# Altium PCB Grabber_DIOT.PCBDOC (part 3 of 7)
Units mm, origin at the board's own origin, x right, y up, seen from the top; angles counter-clockwise.
Board outline 222.9 x 100 mm, 4 copper layers (L1, P2, P3, L4), stack 1.6 mm thick; 235 components, 180 nets, 1032 pads, 664 vias.
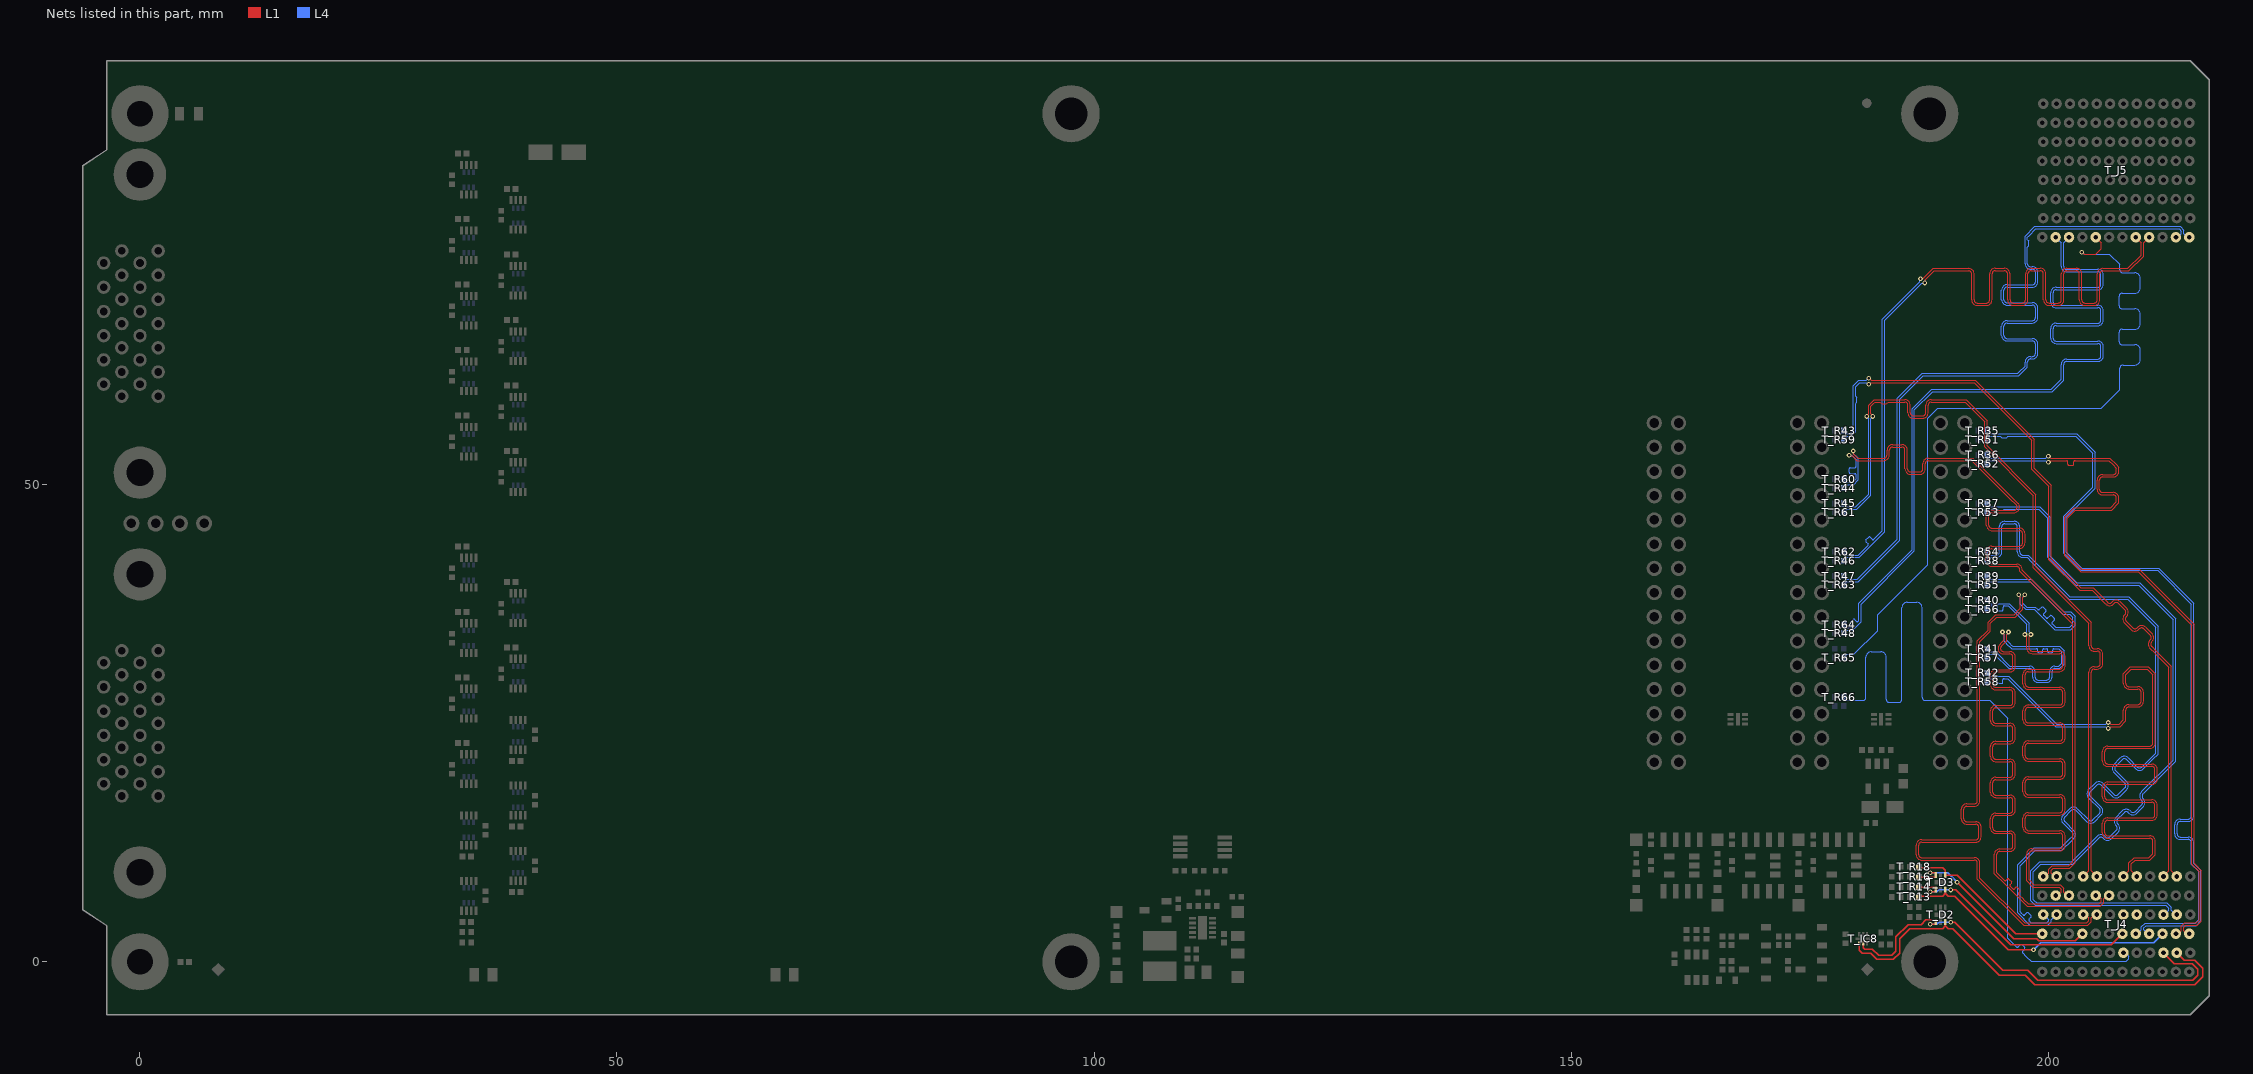
[diagram p4: the nets of this part, all layers, seen from the top]

## Via types
v1: diameter 0.5, hole 0.25, L1 to L4, tented both sides, 661 vias
v2: diameter 0.5, hole 0.25, L1 to L4, 3 vias

## Nets (pads, with @x,y where several pads share a name; then routed paths per layer and width w, separated by ;. In a path a pad name is that pad's centre, name@x,y a point inside that pad or via, vN(x,y) a via of type N, cw(c..) or ccw(c..) an arc to the next point about the centre after c; other vN are vias at no path point) (continued)
BP_IO.LVDS_N14: (continued)
  L4 w0.127: T_R65.1@178.608,31.881 178.835,32.107 178.835,32.149 178.909,32.223 179.654,32.223 182.151,34.719 182.151,36.393 187.375,41.617 187.375,56.963 188.418,58.006 205.601,58.006 207.534,59.94 207.534,60.946 207.534,62.228 cw(c207.859,62.228) 207.859,62.553 209.095,62.553 ccw(c209.095,63.132) 209.675,63.132 209.675,64.109 ccw(c209.095,64.109) 209.095,64.688 207.774,64.688 cw(c207.774,65.013) 207.448,65.013 207.448,65.99 cw(c207.774,65.99) 207.774,66.315 209.095,66.315 ccw(c209.095,66.894) 209.675,66.894 209.675,67.871 ccw(c209.095,67.871) 209.095,68.45 207.774,68.45 cw(c207.774,68.775) 207.448,68.775 207.448,69.752 cw(c207.774,69.752) 207.774,70.077 209.095,70.077 ccw(c209.095,70.656) 209.675,70.656 209.675,71.633 ccw(c209.095,71.633) 209.095,72.212 207.859,72.212 cw(c207.859,72.537) 207.534,72.537 207.534,72.728 207.534,73.095 206.438,74.191 203.792,74.191 203.606,74.377 v1(203.531,74.377)
BP_IO.LVDS_N15: T_J4.F2 T_R66.2 | length 86.5
  L4 w0.127: T_R66.2@178.608,27.74 178.835,27.513 178.835,27.471 178.909,27.397 180.394,27.397 180.585,27.397 ccw(c180.585,27.722) 180.91,27.722 180.91,31.916 cw(c181.489,31.916) 181.489,32.496 182.466,32.496 cw(c182.466,31.916) 183.045,31.916 183.045,27.515 ccw(c183.37,27.515) 183.37,27.19 184.347,27.19 ccw(c184.347,27.515) 184.672,27.515 184.672,37.095 cw(c185.251,37.095) 185.251,37.674 186.228,37.674 cw(c186.228,37.095) 186.807,37.095 186.807,27.722 ccw(c187.132,27.722) 187.132,27.397 187.885,27.397 193.915,27.397 195.766,25.546 195.766,2.49 196.657,1.598 196.702,1.553 ccw(c196.792,1.643) 196.882,1.553 197.097,1.769 cw(c197.186,1.68) 197.275,1.769 197.541,1.503 cw(c197.452,1.414) 197.541,1.325 197.325,1.11 ccw(c197.415,1.02) 197.325,0.93 197.685,0.57 197.73,0.525 198.222,0.033 208.179,0.033 208.473,0.327 208.473,0.371 208.473,0.581 208.104,0.95 T_J4.F2@207.9,0.95
BP_IO.LVDS_P0: T_J4.D3 T_R35.1 | length 83.2
  L4 w0.127: T_R35.1@193.608,55.68 193.835,55.453 193.835,55.411 193.909,55.337 203.033,55.337 204.952,53.417 204.952,49.629 201.921,46.598 201.921,42.906 203.553,41.275 211.593,41.275 215.276,37.591 215.276,16.964 215.276,15.288 cw(c214.697,15.288) 214.697,14.709 213.858,14.709 ccw(c213.858,14.383) 213.532,14.383 213.532,13.407 ccw(c213.858,13.407) 213.858,13.082 214.697,13.082 cw(c214.697,12.502) 215.276,12.502 215.276,12.312 215.276,10.354 216.034,9.596 216.034,4.302 215.525,3.793 210.272,3.793 210.027,3.547 210.027,3.337 210.414,2.95 T_J4.D3@210.6,2.95
BP_IO.LVDS_P1: T_J4.A3 T_R36.1 | length 82.4
  L1 w0.127: v1(200.044,52.983) 200.119,52.983 200.304,52.797 206.469,52.797 207.127,52.139 207.423,51.843 207.423,51.402 cw(c206.843,51.402) 206.843,50.822 205.714,50.822 ccw(c205.714,50.497) 205.388,50.497 205.388,49.521 ccw(c205.714,49.521) 205.714,49.195 206.843,49.195 cw(c206.843,48.616) 207.423,48.616 207.423,48.425 207.423,48.109 206.66,47.347 202.868,47.347 201.999,46.477 201.999,42.661 203.51,41.15 209.554,41.15 215.314,35.39 215.314,10.337 216.086,9.564 216.086,4.251 215.663,3.828 214.441,3.828 214.227,3.613 214.227,3.282 214.559,2.95 T_J4.A3@214.8,2.95
  L4 w0.127: T_R36.1@193.608,53.14 193.835,52.913 193.835,52.871 193.909,52.797 199.783,52.797 199.968,52.983 v1(200.044,52.983)
BP_IO.LVDS_P2: T_J4.B4 T_R37.1 | length 83.1
  L4 w0.127: T_R37.1@193.608,48.06 193.835,47.833 193.835,47.791 193.909,47.717 199.116,47.717 200.216,46.617 200.216,42.498 203.002,39.712 209.637,39.712 213.405,35.944 213.405,21.049 210.082,17.726 209.947,17.591 ccw(c210.177,17.361) 209.947,17.131 209.996,17.082 cw(c209.586,16.673) 209.996,16.263 209.306,15.573 cw(c208.896,15.982) 208.486,15.573 208.425,15.634 ccw(c208.195,15.404) 207.965,15.634 207.275,14.944 ccw(c207.505,14.713) 207.275,14.483 207.336,14.422 cw(c206.926,14.013) 207.336,13.603 206.646,12.913 cw(c206.236,13.322) 205.826,12.913 205.777,12.961 ccw(c205.547,12.731) 205.317,12.961 204.685,12.329 202.592,10.236 199.231,10.236 198.439,9.444 198.439,6.514 198.673,6.28 198.708,6.28 198.817,6.172 212.461,6.172 212.927,5.706 212.927,5.425 213.402,4.95 T_J4.B4@213.5,4.95
BP_IO.LVDS_P3: T_J4.K4 T_R38.1 | length 82.3
  L4 w0.127: T_R38.1@193.608,42.041 193.835,42.267 193.835,42.309 193.909,42.383 194.384,42.383 194.575,42.383 ccw(c194.575,42.962) 195.154,42.962 195.154,45.596 cw(c195.48,45.596) 195.48,45.921 196.456,45.921 cw(c196.456,45.596) 196.781,45.596 196.781,42.962 ccw(c197.361,42.962) 197.361,42.383 197.797,42.383 198.254,41.926 202.159,38.021 208.357,38.021 211.286,35.092 211.286,21.878 210.864,21.456 209.822,20.413 cw(c209.592,20.644) 209.362,20.413 208.409,21.366 ccw(c208,20.956) 207.59,21.366 206.9,20.676 ccw(c207.309,20.266) 206.9,19.856 208.063,18.694 cw(c207.832,18.464) 208.063,18.233 207.372,17.543 cw(c207.142,17.773) 206.912,17.543 205.749,18.706 ccw(c205.34,18.296) 204.93,18.706 204.24,18.016 ccw(c204.649,17.606) 204.24,17.196 205.402,16.034 cw(c205.172,15.803) 205.402,15.573 204.712,14.883 cw(c204.482,15.113) 204.252,14.883 203.089,16.046 ccw(c202.679,15.636) 202.27,16.046 201.58,15.356 ccw(c201.989,14.946) 201.58,14.536 202.532,13.584 cw(c202.302,13.353) 202.532,13.123 202.397,12.989 201.352,11.943 198.569,11.943 196.815,10.188 196.815,5.144 198.105,3.853 199.967,3.853 200.327,4.214 200.327,4.424 200.853,4.95 T_J4.K4@200.9,4.95
BP_IO.LVDS_P4: T_J4.H4 T_R39.1 | length 83.1
  L1 w0.127: v1(196.927,38.465) 196.927,38.39 197.112,38.204 197.112,37.049 196.456,36.393 194.497,36.393 193.712,35.607 193.712,34.777 192.603,33.668 192.603,17.906 192.603,16.888 cw(c192.278,16.888) 192.278,16.562 191.497,16.562 ccw(c191.497,15.983) 190.918,15.983 190.918,15.007 ccw(c191.497,15.007) 191.497,14.427 192.421,14.427 cw(c192.421,14.102) 192.747,14.102 192.747,13.126 cw(c192.421,13.126) 192.421,12.8 186.762,12.8 ccw(c186.762,12.221) 186.182,12.221 186.182,11.245 ccw(c186.762,11.245) 186.762,10.665 192.278,10.665 cw(c192.278,10.34) 192.603,10.34 192.603,10.149 192.603,8.671 197.456,3.818 204.164,3.818 204.527,4.181 204.527,4.618 204.859,4.95 T_J4.H4@205.1,4.95
  L4 w0.127: T_R39.1@193.608,40.44 193.835,40.213 193.835,40.171 193.909,40.097 198.261,40.097 201.648,36.71 202.361,36.71 202.85,36.22 202.85,35.277 202.381,34.808 200.688,34.808 198.562,36.934 197.645,36.934 197.112,37.467 197.112,38.204 196.927,38.39 v1(196.927,38.465)
BP_IO.LVDS_P5: T_J4.J5 T_R40.1 | length 82.4
  L1 w0.127: v1(198.204,34.311) 198.204,34.236 198.019,34.05 198.019,33.081 198.019,32.891 ccw(c198.344,32.891) 198.344,32.565 201.227,32.565 cw(c201.227,31.986) 201.806,31.986 201.806,31.01 cw(c201.227,31.01) 201.227,30.43 197.946,30.43 ccw(c197.946,30.105) 197.62,30.105 197.62,29.129 ccw(c197.946,29.129) 197.946,28.803 201.227,28.803 cw(c201.227,28.224) 201.806,28.224 201.806,27.248 cw(c201.227,27.248) 201.227,26.668 197.946,26.668 ccw(c197.946,26.343) 197.62,26.343 197.62,25.367 ccw(c197.946,25.367) 197.946,25.041 201.227,25.041 cw(c201.227,24.462) 201.806,24.462 201.806,23.486 cw(c201.227,23.486) 201.227,22.906 197.946,22.906 ccw(c197.946,22.581) 197.62,22.581 197.62,21.605 ccw(c197.946,21.605) 197.946,21.279 201.227,21.279 cw(c201.227,20.7) 201.806,20.7 201.806,19.724 cw(c201.227,19.724) 201.227,19.144 197.946,19.144 ccw(c197.946,18.819) 197.62,18.819 197.62,17.843 ccw(c197.946,17.843) 197.946,17.517 201.227,17.517 cw(c201.227,16.938) 201.806,16.938 201.806,15.962 cw(c201.227,15.962) 201.227,15.382 197.946,15.382 ccw(c197.946,15.057) 197.62,15.057 197.62,14.081 ccw(c197.946,14.081) 197.946,13.755 201.227,13.755 cw(c201.227,13.176) 201.806,13.176 201.806,12.2 cw(c201.227,12.2) 201.227,11.62 198.344,11.62 ccw(c198.344,11.295) 198.019,11.295 198.019,10.049 198.019,8.59 198.527,8.082 201.264,8.082 201.627,7.719 201.627,7.282 201.959,6.95 T_J4.J5@202.2,6.95
  L4 w0.127: T_R40.1@193.608,37.9 193.835,37.673 193.835,37.631 193.909,37.557 195.946,37.557 198.019,35.485 198.019,34.572 198.204,34.387 v1(198.204,34.311)
BP_IO.LVDS_P6: T_J4.G5 T_R41.1 | length 83.2
  L1 w0.127: v1(195.226,34.566) 195.226,34.49 195.412,34.305 195.412,33.737 195.165,33.489 194.931,33.256 ccw(c195.341,32.846) 195.341,32.267 195.999,32.267 cw(c195.999,31.942) 196.325,31.942 196.325,30.965 cw(c195.999,30.965) 195.999,30.64 194.537,30.64 ccw(c194.537,30.061) 193.958,30.061 193.958,29.084 ccw(c194.537,29.084) 194.537,28.505 195.999,28.505 cw(c195.999,28.18) 196.325,28.18 196.325,27.203 cw(c195.999,27.203) 195.999,26.878 194.537,26.878 ccw(c194.537,26.299) 193.958,26.299 193.958,25.322 ccw(c194.537,25.322) 194.537,24.743 195.999,24.743 cw(c195.999,24.418) 196.325,24.418 196.325,23.441 cw(c195.999,23.441) 195.999,23.116 194.537,23.116 ccw(c194.537,22.537) 193.958,22.537 193.958,21.56 ccw(c194.537,21.56) 194.537,20.981 195.999,20.981 cw(c195.999,20.656) 196.325,20.656 196.325,19.679 cw(c195.999,19.679) 195.999,19.354 194.537,19.354 ccw(c194.537,18.775) 193.958,18.775 193.958,17.798 ccw(c194.537,17.798) 194.537,17.219 195.999,17.219 cw(c195.999,16.894) 196.325,16.894 196.325,15.917 cw(c195.999,15.917) 195.999,15.592 194.537,15.592 ccw(c194.537,15.013) 193.958,15.013 193.958,14.036 ccw(c194.537,14.036) 194.537,13.457 195.999,13.457 cw(c195.999,13.132) 196.325,13.132 196.325,12.155 cw(c195.999,12.155) 195.999,11.83 194.955,11.83 ccw(c194.955,11.251) 194.375,11.251 194.375,10.139 194.375,9.239 195.439,8.176 197.796,5.818 205.464,5.818 205.827,6.181 205.827,6.618 206.159,6.95 T_J4.G5@206.4,6.95
  L4 w0.127: T_R41.1@193.608,32.82 193.835,32.593 193.835,32.551 193.909,32.477 194.495,32.477 195.969,31.002 196.919,31.002 198.076,31.002 cw(c198.076,30.443) 198.636,30.443 198.636,29.845 ccw(c198.941,29.845) 198.941,29.539 199.857,29.539 ccw(c199.857,29.845) 200.163,29.845 200.163,30.443 cw(c200.722,30.443) 200.722,31.002 200.912,31.002 201.149,31.002 201.453,31.306 201.453,32.495 201.14,32.808 200.686,32.808 200.623,32.808 ccw(c200.623,32.681) 200.496,32.681 200.496,32.524 cw(c200.39,32.524) 200.39,32.419 200.074,32.419 cw(c200.074,32.524) 199.969,32.524 199.969,32.703 ccw(c199.863,32.703) 199.863,32.808 199.547,32.808 ccw(c199.547,32.703) 199.442,32.703 199.442,32.524 cw(c199.336,32.524) 199.336,32.419 199.02,32.419 cw(c199.02,32.524) 198.915,32.524 198.915,32.681 ccw(c198.788,32.681) 198.788,32.808 198.475,32.808 196.182,32.808 195.92,33.07 195.844,33.146 195.412,33.578 195.412,34.305 195.226,34.49 v1(195.226,34.566)
BP_IO.LVDS_P7: T_J4.E6 T_R42.1 | length 82.3
  L1 w0.127: v1(206.317,25.089) 206.393,25.089 206.578,24.903 207.447,24.903 207.902,25.358 207.902,25.529 207.902,26.387 cw(c208.482,26.387) 208.482,26.967 209.428,26.967 ccw(c209.428,27.292) 209.754,27.292 209.754,28.268 ccw(c209.428,28.268) 209.428,28.594 208.482,28.594 cw(c208.482,29.173) 207.902,29.173 207.902,29.364 207.902,30.198 208.633,30.928 210.519,30.928 211.245,30.202 211.245,23.854 211.245,22.941 cw(c210.665,22.941) 210.665,22.362 206.276,22.362 ccw(c206.276,22.036) 205.95,22.036 205.95,21.06 ccw(c206.276,21.06) 206.276,20.735 210.882,20.735 cw(c210.882,20.155) 211.461,20.155 211.461,19.179 cw(c210.882,19.179) 210.882,18.6 206.276,18.6 ccw(c206.276,18.274) 205.95,18.274 205.95,17.298 ccw(c206.276,17.298) 206.276,16.973 210.882,16.973 cw(c210.882,16.393) 211.461,16.393 211.461,15.417 cw(c210.882,15.417) 210.882,14.838 206.276,14.838 ccw(c206.276,14.512) 205.95,14.512 205.95,13.536 ccw(c206.276,13.536) 206.276,13.211 210.665,13.211 cw(c210.665,12.631) 211.245,12.631 211.245,12.441 211.245,11.225 210.676,10.656 209.13,10.656 208.727,10.253 208.727,9.523 T_J4.E6@209.3,8.95
  L4 w0.127: T_R42.1@193.608,30.28 193.835,30.053 193.835,30.011 193.909,29.937 195.873,29.937 200.906,24.903 206.056,24.903 206.242,25.089 v1(206.317,25.089)
BP_IO.LVDS_P8: T_J4.B6 T_R43.1 | length 83.1
  L1 w0.127: v1(181.219,61.162) 181.295,61.162 181.48,60.977 185.499,60.977 185.5,60.975 192.366,60.975 198.568,54.774 198.568,51.729 200.346,49.951 200.346,42.269 203.421,39.195 204.719,39.195 206.092,37.822 206.189,37.724 206.226,37.687 ccw(c206.456,37.917) 206.686,37.687 206.74,37.74 cw(c207.149,37.331) 207.559,37.74 208.249,37.05 cw(c207.84,36.64) 208.287,36.272 208.287,36.268 208.184,36.166 ccw(c208.415,35.936) 208.184,35.706 208.875,35.015 ccw(c209.105,35.245) 209.335,35.015 209.4,35.08 cw(c209.81,34.671) 210.219,35.08 210.91,34.39 cw(c210.5,33.98) 210.947,33.612 210.947,33.608 210.856,33.517 ccw(c211.086,33.287) 210.856,33.057 211.344,32.57 211.441,32.472 212.927,30.986 212.927,9.523 T_J4.B6@213.5,8.95
  L4 w0.127: T_R43.1@178.608,55.68 178.835,55.453 178.835,55.411 178.909,55.337 179.213,55.337 179.567,55.691 179.567,60.391 180.153,60.977 180.958,60.977 181.144,61.162 v1(181.219,61.162)
BP_IO.LVDS_P9: T_J4.K6 T_R44.1 | length 86
  L1 w0.127: v1(179.593,53.542) 179.647,53.489 179.647,53.227 180.074,52.799 182.607,52.799 182.798,52.799 ccw(c182.798,53.125) 183.123,53.125 183.123,53.635 cw(c183.703,53.635) 183.703,54.215 184.679,54.215 cw(c184.679,53.635) 185.258,53.635 185.258,51.681 ccw(c185.584,51.681) 185.584,51.355 186.56,51.355 ccw(c186.56,51.681) 186.885,51.681 186.885,52.22 cw(c187.465,52.22) 187.465,52.799 188.202,52.799 192.121,52.799 196.31,48.611 196.847,48.073 cw(c196.437,47.664) 196.437,47.084 194.121,47.084 ccw(c194.121,46.759) 193.795,46.759 193.795,45.783 ccw(c194.121,45.783) 194.121,45.457 197.009,45.457 cw(c197.009,44.878) 197.589,44.878 197.589,43.902 cw(c197.009,43.902) 197.009,43.322 194.121,43.322 ccw(c194.121,42.997) 193.795,42.997 193.795,42.021 ccw(c194.121,42.021) 194.121,41.695 196.711,41.695 cw(c196.711,41.116) 197.291,41.116 197.291,41.03 197.396,40.925 202.849,35.472 202.849,10.39 202.287,9.828 200.541,9.828 200.327,9.613 200.327,9.282 200.659,8.95 T_J4.K6@200.9,8.95
  L4 w0.127: T_R44.1@178.608,49.661 178.835,49.887 178.835,49.929 178.909,50.003 179.613,50.003 180.13,50.52 180.13,52.743 180.055,52.818 179.771,53.102 179.647,53.227 179.647,53.489 v1(179.593,53.542)
BP_IO.LVDS_P10: T_J4.H6 T_R45.1 | length 83.1
  L1 w0.127: v1(180.999,57.169) 180.999,57.244 181.184,57.43 181.184,58.349 181.762,58.926 184.172,58.926 184.981,58.926 cw(c184.981,58.347) 185.56,58.347 185.56,57.565 ccw(c185.885,57.565) 185.885,57.24 186.862,57.24 ccw(c186.862,57.565) 187.187,57.565 187.187,58.347 cw(c187.766,58.347) 187.766,58.926 187.957,58.926 191.413,58.926 193.613,56.726 193.613,54.078 198.726,48.965 198.726,41.392 204.527,35.591 204.527,33.337 204.527,33.146 ccw(c204.852,33.146) 204.852,32.821 205.16,32.821 cw(c205.16,32.242) 205.739,32.242 205.739,31.265 cw(c205.16,31.265) 205.16,30.686 204.852,30.686 ccw(c204.852,30.361) 204.527,30.361 204.527,29.436 204.527,9.523 T_J4.H6@205.1,8.95
  L4 w0.127: T_R45.1@178.608,48.06 178.835,47.833 178.835,47.791 178.909,47.717 179.865,47.717 181.184,49.036 181.184,56.908 180.999,57.094 v1(180.999,57.169)
BP_IO.LVDS_P11: T_J5.D1 T_R46.1 | length 86
  L1 w0.127: v1(187.072,71.167) 187.125,71.221 187.125,71.483 188.066,72.424 189.602,72.424 191.674,72.424 cw(c191.674,72.099) 191.999,72.099 191.999,69.381 ccw(c192.579,69.381) 192.579,68.802 193.555,68.802 ccw(c193.555,69.381) 194.134,69.381 194.134,72.109 cw(c194.46,72.109) 194.46,72.435 195.436,72.435 cw(c195.436,72.109) 195.761,72.109 195.761,69.381 ccw(c196.341,69.381) 196.341,68.802 197.317,68.802 ccw(c197.317,69.381) 197.896,69.381 197.896,72.109 cw(c198.222,72.109) 198.222,72.435 199.198,72.435 cw(c199.198,72.109) 199.523,72.109 199.523,69.381 ccw(c200.103,69.381) 200.103,68.802 201.079,68.802 ccw(c201.079,69.381) 201.658,69.381 201.658,72.109 cw(c201.984,72.109) 201.984,72.435 202.96,72.435 cw(c202.96,72.109) 203.285,72.109 203.285,69.381 ccw(c203.865,69.381) 203.865,68.802 204.841,68.802 ccw(c204.841,69.381) 205.42,69.381 205.42,72.099 cw(c205.746,72.099) 205.746,72.424 206.391,72.424 208.476,72.424 210.027,73.975 210.027,75.377 T_J5.D1@210.6,75.95
  L4 w0.127: T_R46.1@178.608,42.041 178.835,42.267 178.835,42.309 178.909,42.383 180.22,42.383 182.893,45.056 182.893,67.251 186.756,71.114 187.018,71.114 v1(187.072,71.167)
BP_IO.LVDS_P12: T_J5.A1 T_R47.1 | length 83.1
  L4 w0.127: T_R47.1@178.608,40.44 178.835,40.213 178.835,40.171 178.909,40.097 180.004,40.097 184.205,44.298 184.205,59.067 186.82,61.681 196.826,61.681 196.971,61.826 197.59,62.445 197.59,62.869 cw(c198.17,62.869) 198.17,63.448 198.365,63.448 ccw(c198.365,63.774) 198.69,63.774 198.69,64.75 ccw(c198.365,64.75) 198.365,65.075 195.702,65.075 cw(c195.702,65.655) 195.123,65.655 195.123,66.631 cw(c195.702,66.631) 195.702,67.21 198.365,67.21 ccw(c198.365,67.536) 198.69,67.536 198.69,68.512 ccw(c198.365,68.512) 198.365,68.837 195.702,68.837 cw(c195.702,69.417) 195.123,69.417 195.123,70.393 cw(c195.702,70.393) 195.702,70.972 198.365,70.972 ccw(c198.365,71.298) 198.69,71.298 198.69,72.274 ccw(c198.365,72.274) 198.365,72.599 198.17,72.599 cw(c198.17,73.179) 197.59,73.179 197.59,73.369 197.59,76.044 198.634,77.087 213.845,77.087 214.227,76.706 214.227,76.303 214.58,75.95 T_J5.A1@214.8,75.95
BP_IO.LVDS_P13: T_J5.J1 T_R48.1 | length 86.1
  L4 w0.127: T_R48.1@178.608,34.441 178.835,34.667 178.835,34.689 178.909,34.763 179.535,34.763 180.398,35.626 180.398,37.465 186.002,43.07 186.002,57.842 187.926,59.766 200.434,59.766 201.627,60.958 201.627,61.632 201.627,62.6 cw(c201.952,62.6) 201.952,62.926 205.22,62.926 ccw(c205.22,63.505) 205.8,63.505 205.8,64.481 ccw(c205.22,64.481) 205.22,65.061 200.852,65.061 cw(c200.852,65.386) 200.527,65.386 200.527,66.362 cw(c200.852,66.362) 200.852,66.688 205.22,66.688 ccw(c205.22,67.267) 205.8,67.267 205.8,68.243 ccw(c205.22,68.243) 205.22,68.823 200.852,68.823 cw(c200.852,69.148) 200.527,69.148 200.527,70.124 cw(c200.852,70.124) 200.852,70.45 205.22,70.45 ccw(c205.22,71.029) 205.8,71.029 205.8,72.005 ccw(c205.22,72.005) 205.22,72.585 201.952,72.585 cw(c201.952,72.91) 201.627,72.91 201.627,73.101 201.627,75.377 T_J5.J1@202.2,75.95

## Text inside footprints (layer, text, board x,y; h text height)
T_J4: TopOverlay "A" at 215.3,11.45 h1 r90; TopOverlay "B" at 213.9,11.45 h1 r90; TopOverlay "C" at 212.5,11.45 h1 r90; TopOverlay "D" at 211.1,10.35 h1 r90; TopOverlay "E" at 209.7,10.35 h1 r90; TopOverlay "F" at 208.3,10.35 h1 r90; TopOverlay "G" at 206.9,10.35 h1 r90; TopOverlay "H" at 205.5,10.35 h1 r90; TopOverlay "I" at 204.1,10.6 h1 r90; TopOverlay "J" at 202.7,10.35 h1 r90; TopOverlay "K" at 201.3,10.35 h1 r90; TopOverlay "L" at 199.9,10.35 h1 r90; TopOverlay "1" at 194.85,-1.4 h1 r90; TopOverlay "2" at 194.85,0.6 h1 r90; TopOverlay "3" at 194.85,2.6 h1 r90; TopOverlay "4" at 194.85,4.6 h1 r90; TopOverlay "5" at 194.85,6.6 h1 r90; TopOverlay "6" at 194.85,8.6 h1 r90; DrillDrawing "PRESS-FIT TECHNOLOGY" at 198.539,-7.64 h1; DrillDrawing "Diam. 0.5mm +/-0.05" at 198.539,-9.14 h1; Mechanical14 "A" at 215.3,-4.25 h1 r90; Mechanical14 "B" at 213.9,-4.25 h1 r90; Mechanical14 "C" at 212.5,-4.25 h1 r90; Mechanical14 "D" at 211.1,-3.25 h1 r90; Mechanical14 "E" at 209.7,-3.25 h1 r90; Mechanical14 "F" at 208.3,-3.25 h1 r90; Mechanical14 "G" at 206.9,-3.25 h1 r90; Mechanical14 "H" at 205.5,-3.25 h1 r90; Mechanical14 "I" at 204.1,-3 h1 r90; Mechanical14 "J" at 202.7,-3.25 h1 r90; Mechanical14 "K" at 201.3,-3.25 h1 r90; Mechanical14 "L" at 199.9,-3.25 h1 r90; Mechanical14 "1" at 194.85,-1.4 h1 r90; Mechanical14 "2" at 194.85,0.6 h1 r90; Mechanical14 "3" at 194.85,2.6 h1 r90; Mechanical14 "4" at 194.85,4.6 h1 r90; Mechanical14 "5" at 194.85,6.6 h1 r90; Mechanical14 "6" at 194.85,8.6 h1 r90; Mechanical8 "Top Surface of Mother Board" at 229.15,-0.425 h0.5 r90; Mechanical8 "Edge of Daugher Card" at 217.65,0.725 h0.5 r90
T_J5: TopOverlay "A" at 215.3,72.75 h1 r90; TopOverlay "B" at 213.9,72.75 h1 r90; TopOverlay "C" at 212.5,72.75 h1 r90; TopOverlay "D" at 211.1,73.75 h1 r90; TopOverlay "E" at 209.7,73.75 h1 r90; TopOverlay "F" at 208.3,73.75 h1 r90; TopOverlay "G" at 206.9,73.75 h1 r90; TopOverlay "H" at 205.5,73.75 h1 r90; TopOverlay "I" at 204.1,74 h1 r90; TopOverlay "J" at 202.7,73.75 h1 r90; TopOverlay "K" at 201.3,73.75 h1 r90; TopOverlay "L" at 199.9,73.75 h1 r90; TopOverlay "1" at 194.85,75.6 h1 r90; TopOverlay "2" at 194.85,77.6 h1 r90; TopOverlay "3" at 194.85,79.6 h1 r90; TopOverlay "4" at 194.85,81.6 h1 r90; TopOverlay "5" at 194.85,83.6 h1 r90; TopOverlay "6" at 194.85,85.6 h1 r90; TopOverlay "8" at 194.85,89.6 h1 r90; TopOverlay "7" at 194.85,87.6 h1 r90; DrillDrawing "PRESS-FIT TECHNOLOGY" at 198.38,97.034 h1; DrillDrawing "Diam. 0.5mm +/-0.05" at 198.38,95.534 h1; Mechanical14 "A" at 215.3,72.75 h1 r90; Mechanical14 "B" at 213.9,72.75 h1 r90; Mechanical14 "C" at 212.5,72.75 h1 r90; Mechanical14 "D" at 211.1,73.75 h1 r90; Mechanical14 "E" at 209.7,73.75 h1 r90; Mechanical14 "F" at 208.3,73.75 h1 r90; Mechanical14 "G" at 206.9,73.75 h1 r90; Mechanical14 "H" at 205.5,73.75 h1 r90; Mechanical14 "I" at 204.1,74 h1 r90; Mechanical14 "J" at 202.7,73.75 h1 r90; Mechanical14 "K" at 201.3,73.75 h1 r90; Mechanical14 "L" at 199.9,73.75 h1 r90; Mechanical14 "1" at 194.85,75.6 h1 r90; Mechanical14 "2" at 194.85,77.6 h1 r90; Mechanical14 "3" at 194.85,79.6 h1 r90; Mechanical14 "4" at 194.85,81.6 h1 r90; Mechanical14 "5" at 194.85,83.6 h1 r90; Mechanical14 "6" at 194.85,85.6 h1 r90; Mechanical14 "8" at 194.85,89.6 h1 r90; Mechanical14 "7" at 194.85,87.6 h1 r90; Mechanical8 "Top Surface of Mother Board" at 229.15,78.575 h0.5 r90; Mechanical8 "Edge of Daugher Card" at 217.65,79.725 h0.5 r90